# Altium PCB MA730GQ.PcbDoc
Units mil, origin at the board's own origin, x right, y up, seen from the top; angles counter-clockwise.
Board outline 1600 x 1600 mil, 2 copper layers (Top Layer, Bottom Layer); 8 components, 9 nets, 33 pads, 12 vias.
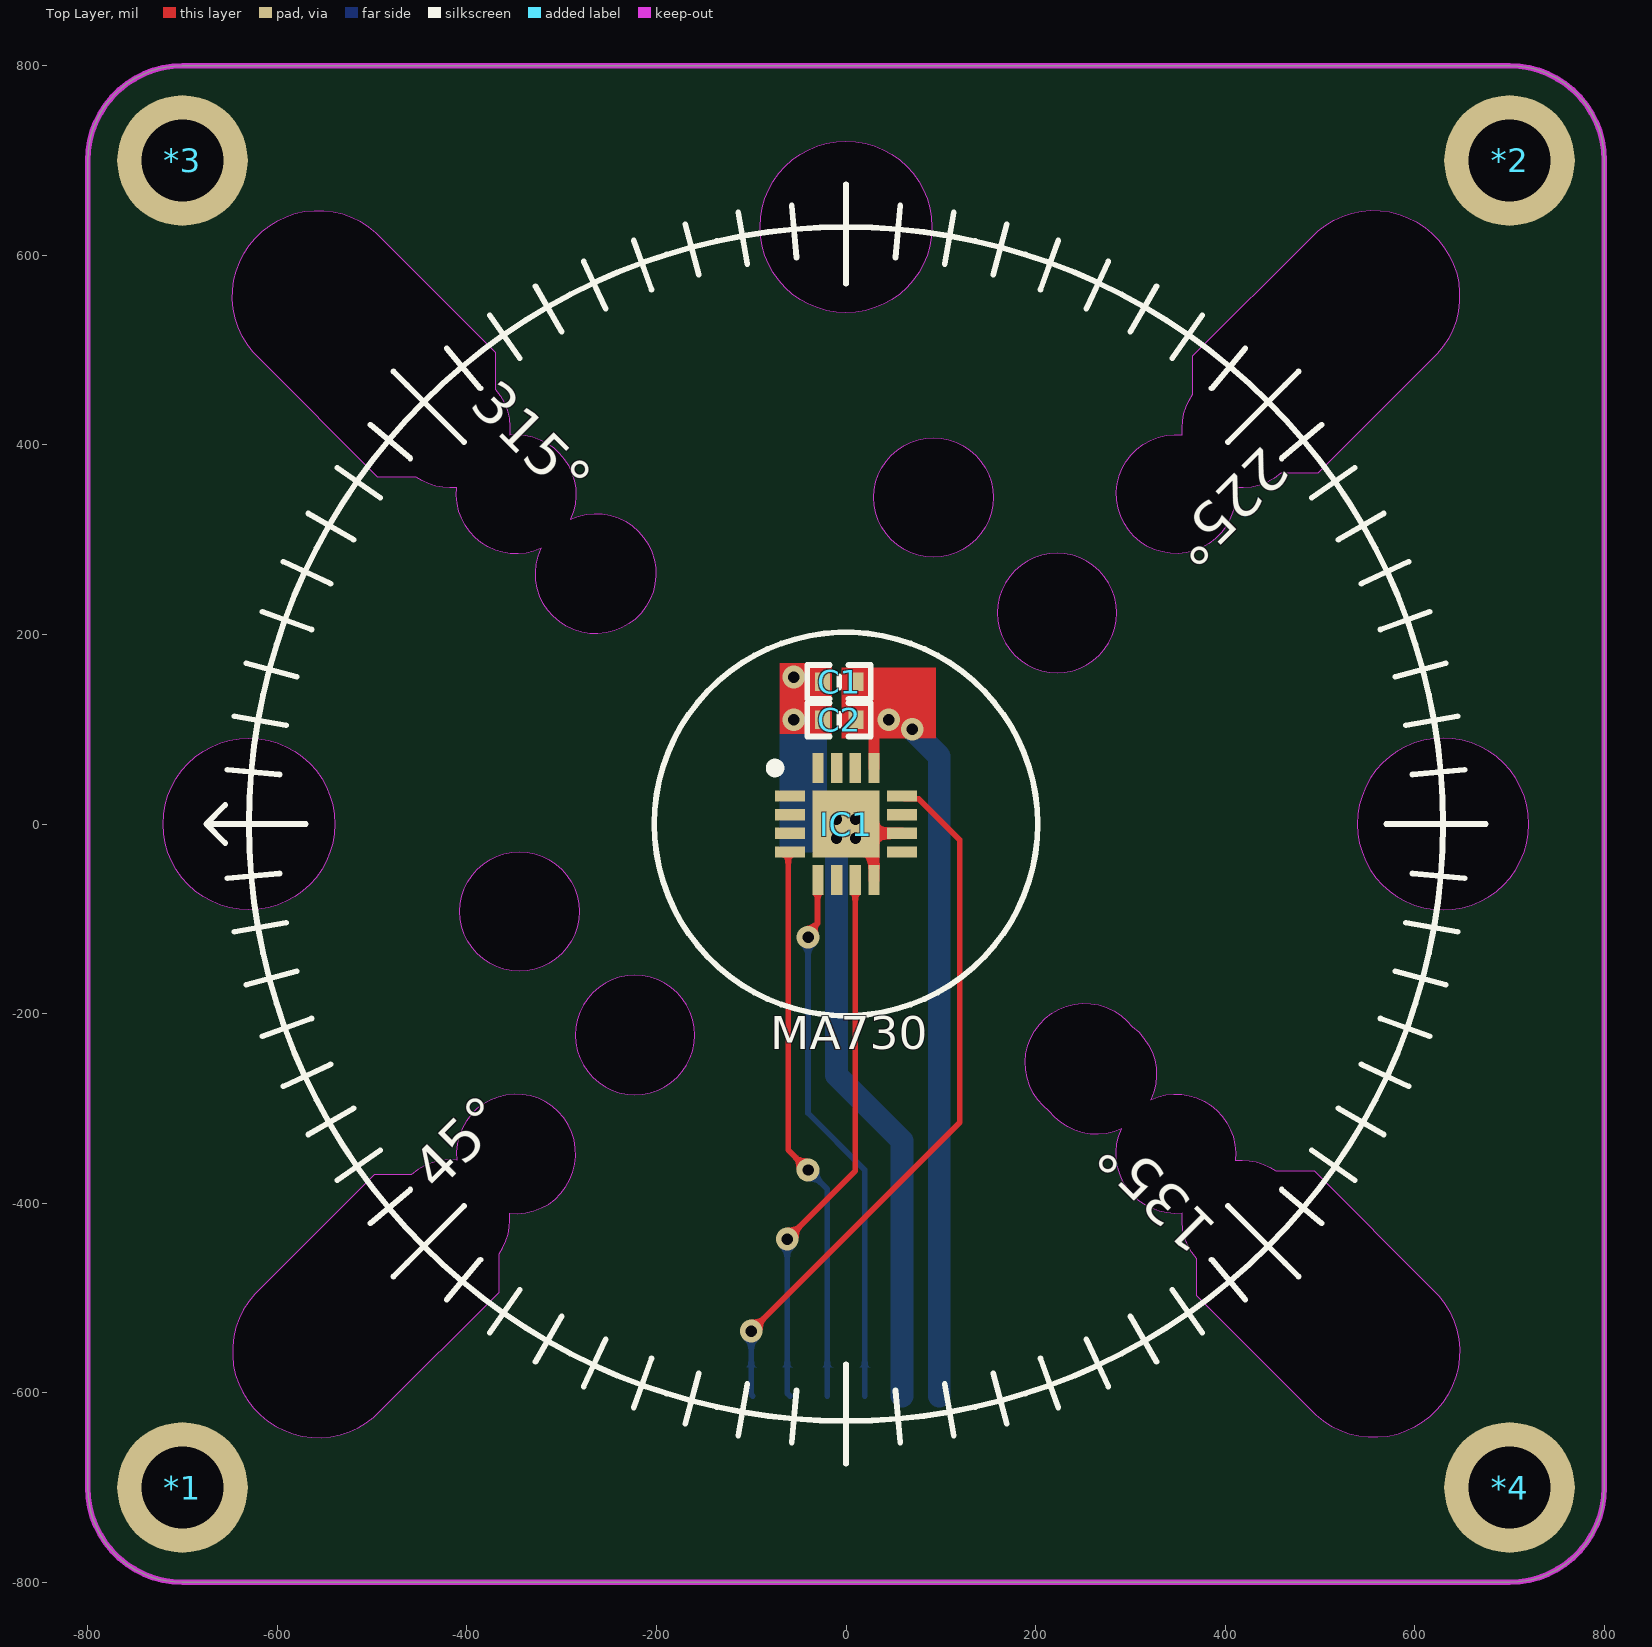
[diagram p0: Top Layer view]
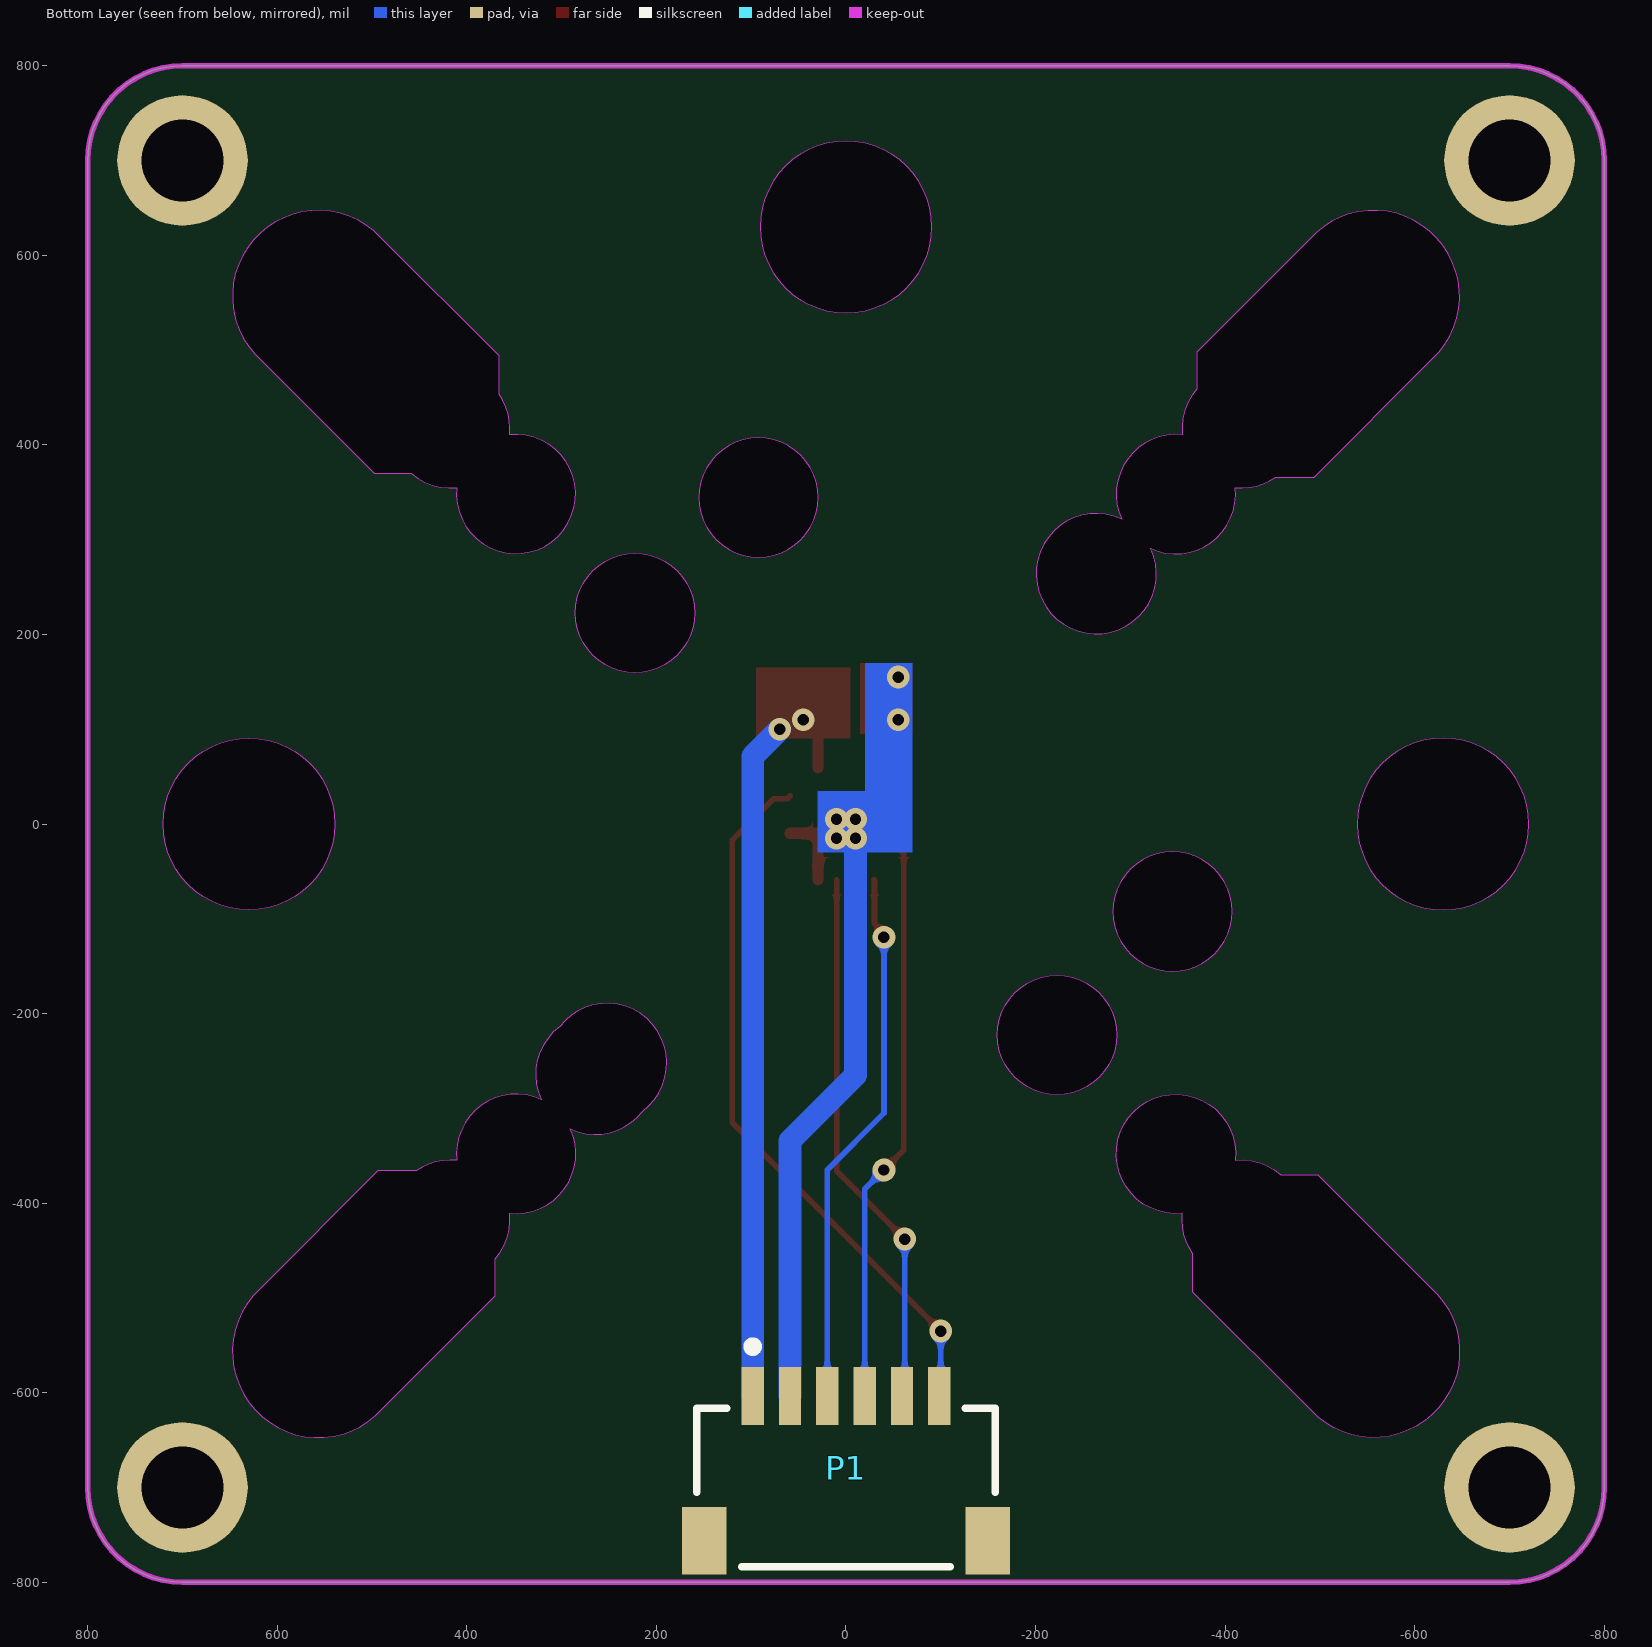
[diagram p1: Bottom Layer view, seen from below]
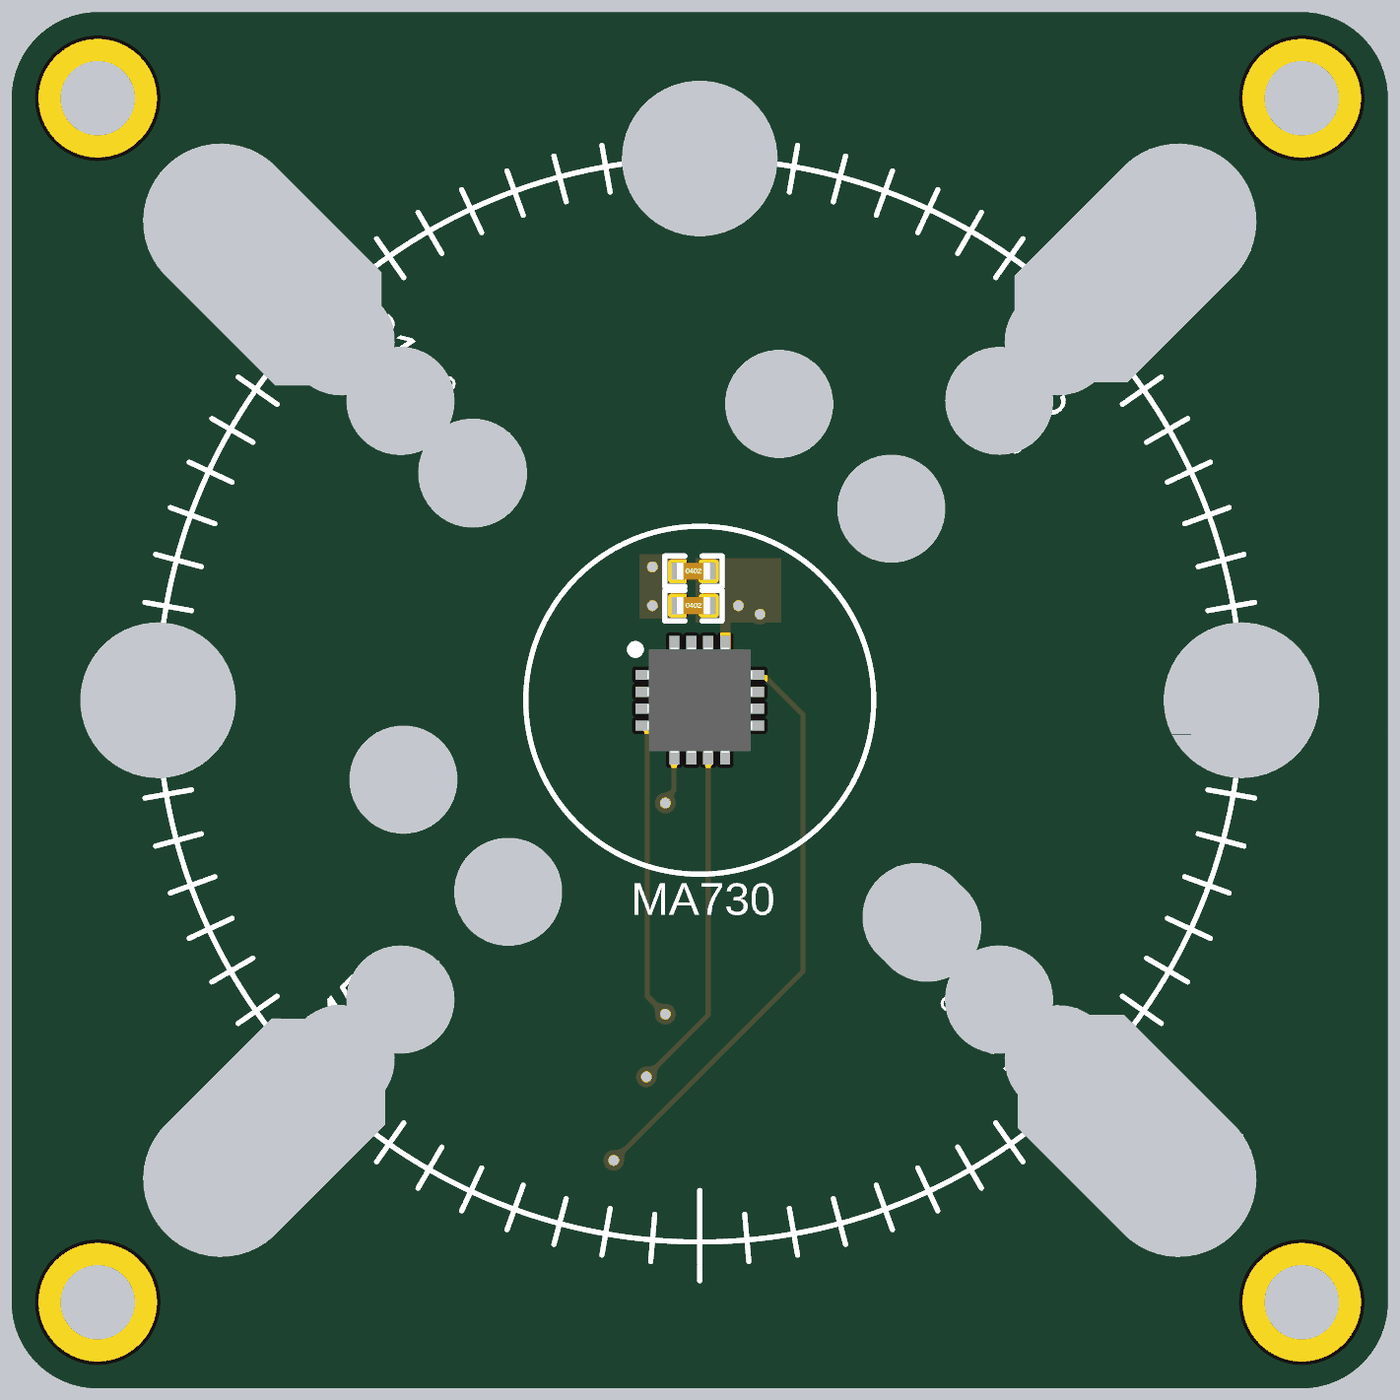
[diagram p2: 3D render of the assembled board from above, using the file's embedded part models]

## Layer stack, top to bottom
Top Solder: solder mask 0.4, Solder Resist, Dk 3.5
Top Layer: signal copper 1.4
Dielectric 1: dielectric 12.6, FR-4, Dk 4.8
Bottom Layer: signal copper 1.4
Bottom Solder: solder mask 0.4, Solder Resist, Dk 3.5

## Board outline
-800,-700 -800,700 cw(c-699.99,699.99) -700,800 700,800 cw(c699.99,699.99) 800,700 800,-700 cw(c699.99,-699.99) 700,-800 -700,-800 cw(c-699.99,-699.99)
cut-out: 267.26,267.26 ccw(c222.72,222.72) 178.18,267.26 ccw(c222.72,222.72) 178.18,178.18 ccw(c222.72,222.72) 267.26,178.18 ccw(c222.72,222.72)
cut-out: -178.16,-178.16 ccw(c-222.7,-222.7) -267.25,-178.16 ccw(c-222.7,-222.7) -267.25,-267.25 ccw(c-222.7,-222.7) -178.16,-267.25 ccw(c-222.7,-222.7)
cut-out: -629.92,-90.55 cw(c-629.92,0) -720.47,0 cw(c-629.92,0) -629.92,90.55 cw(c-629.92,0) -539.37,0 cw(c-629.92,0)
cut-out: 539.37,0 ccw(c629.92,0) 629.92,-90.55 ccw(c629.92,0) 720.47,0 ccw(c629.92,0) 629.92,90.55 ccw(c629.92,0)
cut-out: 0,539.37 cw(c0,629.92) -90.55,629.92 cw(c0,629.92) 0,720.47 cw(c0,629.92) 90.55,629.92 cw(c0,629.92)
cut-out: -344.53,-155.3 cw(c-344.53,-92.31) -407.52,-92.31 cw(c-344.53,-92.31) -344.53,-29.32 cw(c-344.53,-92.31) -281.54,-92.31 cw(c-344.53,-92.31)
cut-out: 92.33,281.55 cw(c92.33,344.55) 29.33,344.55 cw(c92.33,344.55) 92.33,407.54 cw(c92.33,344.55) 155.32,344.55 cw(c92.33,344.55)
cut-out: -493.82,365.83 -618.7,490.71 cw(c-556.77,556.77) -495.99,623.89 -370,497.9 -370,458.91 cw(c-417.56,417.63) -354.97,410.64 cw(c-348.13,347.91) -290.71,321.74 cw(c-264.09,264.1) -321.73,290.72 cw(c-347.98,347.98) -410.59,354.87 cw(c-417.45,417.53) -453.52,365.83
cut-out: -623.89,-495.99 ccw(c-556.77,-556.77) -490.71,-618.7 -365.83,-493.82 -365.83,-453.52 ccw(c-417.57,-417.58) -354.96,-410.6 ccw(c-348.02,-348.04) -410.61,-354.69 ccw(c-417.23,-417.48) -458.91,-370.06 -497.9,-370
cut-out: 354.97,-410.64 cw(c348.13,-347.91) 290.71,-321.74 cw(c264.39,-264.76) 214.67,-303.06 cw(c252.13,-252.27) 302.15,-213.8 cw(c264.3,-264.38) 321.73,-290.72 cw(c347.98,-347.98) 410.59,-354.87 cw(c417.45,-417.53) 453.52,-365.83 493.82,-365.83 618.7,-490.71 cw(c556.77,-556.77) 495.99,-623.89 370,-497.9 370,-458.91 cw(c417.55,-417.63)
cut-out: 354.87,410.59 cw(c417.53,417.45) 365.83,453.52 365.83,493.82 490.71,618.7 cw(c556.77,556.77) 623.89,495.99 497.9,370 458.91,370 cw(c417.63,417.56) 410.64,354.97 cw(c348.17,348.1)

## Design rules (kind name [scope] priority, off if disabled: settings)
Clearance [All] p1: gap=6 ignorepadtopadclearanceinfootprint=TRUE except(0: Arc-Hole Track-Hole SMDPad-Hole THPad-Hole Via-Hole Fill-Hole Poly-Hole Region-Hole Text-Hole)
PolygonConnect [All] p1: connectstyle=Relief reliefconductorwidth=10 reliefentries=4 polygonreliefangle="90 Angle" airgapwidth=10
RoutingVias [All] p1: holewidth=28 width=50 viastyle="Through Hole" minholewidth=12 minwidth=24 maxholewidth=28 maxwidth=50
SolderMaskExpansion [All] p1: expansion=4 istentingtop=FALSE
Width [All] p1: maxlimit=100 minlimit=6 preferedwidth=10
30 further rules are at their usual default settings.

## Components (designator, comment, footprint, x,y, rotation, side; value= is the part's Value field where it differs from the comment)
*1 "PAD2.0" PAD2.0 -699.99,-699.99 r0 top
*2 "PAD2.0" PAD2.0 699.99,699.99 r0 top
*3 "PAD2.0" PAD2.0 -699.99,699.99 r0 top
*4 "PAD2.0" PAD2.0 699.99,-699.99 r0 top
C1 "10uF" "C 0402_L" -7.28,150 r0 top
C2 "0.1uF" "C 0402_L" -7.28,110 r0 top
IC1 "MA730GQ-Z" QFN50P300X300X100-17N-D 0,0 r0 top
P1 "ENC_SPI" JST-SM06B-SRSS-TB_V 0,-700 r180 bottom

## Footprints (in the part's own frame and the unit in brackets; to place one, negate y for a bottom-side part, rotate by r counter-clockwise, add the part's x,y. Pads: shape width x height; smd on the part's side, far side on the other; paste and mask are expansions set on the pad)
"C 0402_L" [mm] "无极性贴片电容         淘宝ID:黄晶宝石"
  rect 0.4x0.5 smd: 1(-0.45,0) 2(0.45,0)
  silkscreen extent -0.85,-0.45 0.85,0.45, body extent -0.5,-0.26 0.5,0.26, height 0.53
JST-SM06B-SRSS-TB_V [mm] "SMD, 6-Leads, Body 8x4.25mm, Pitch 1mm"
  rect 0.6x1.55 smd: 1(-2.5,2.45) 2(-1.5,2.45) 3(-0.5,2.45) 4(0.5,2.45) 5(1.5,2.45) 6(2.5,2.45)
  rect 1.2x1.8 smd: MP1(-3.8,-1.425) MP2(3.8,-1.425)
  silkscreen extent -4,-2.12 4,3.9, body extent -4,-2.12 4,2.83, height 2.9
PAD2.0 [mm]
  round 3.5 hole 2.2: 0(0,0)
QFN50P300X300X100-17N-D [mm]
  rect 0.8x0.3 smd: 1(-1.5,0.75) 2(-1.5,0.25) 3(-1.5,-0.25) 4(-1.5,-0.75) 9(1.5,-0.75) 10(1.5,-0.25) 11(1.5,0.25) 12(1.5,0.75)
  rect 0.3x0.8 smd: 5(-0.75,-1.5) 6(-0.25,-1.5) 7(0.25,-1.5) 8(0.75,-1.5) 13(0.75,1.5) 14(0.25,1.5) 15(-0.25,1.5) 16(-0.75,1.5)
  rect 1.8x1.8 smd: 17(0,0)
  silkscreen extent -2.02,1.38 -1.77,1.62, body extent -1.55,-1.55 1.55,1.55, height 1

## Part data
C1 C2: library part C, "贴片电容"
IC1: "Integrated Circuit", Manufacturer_Name="Monolithic Power Systems (MPS)", Mouser Part Number=946-MA730GQ-Z, Datasheet Link=https://www.monolithicpower.com/pub/media/document/m/a/ma730_r1.01.pdf, Height=1mm, Manufacturer_Part_Number=MA730GQ-Z, Mouser Price/Stock=https://www.mouser.co.uk/ProductDetail/Monolithic-Power-Systems-MPS/MA730GQ-Z?qs=YCa%2FAAYMW01z3klrRj76PA%3D%3D
P1: library part SM06B-SRSS-TB(LF)(SN), "Male Header, Pitch 1 mm, 1 x 6 Position, Height 2.9 mm, -25 to 85 degC, RoHS, Tape and Reel", Manufacturer=JST, Package Description="Male Header, Pitch 1 mm, 1 X 6 Position, Height 2.9 mm", Datasheet URL=http://www.jst-mfg.com/product/pdf/eng/eSR.pdf, Datasheet Version=05/2016, Manufacturer URL=http://www.jst.com/home2.html, Mounting Technology=SurfaceMount, No of Positions=6, Package Reference=SM06B-SRSS-TB(LF)(SN), Pitch=1mm, Style/Orientation=RightAngleHeader/Plug, Termination=Solder, Type=ShroudedHeader

## Via types
v1: diameter 24, hole 12, Top Layer to Bottom Layer, tented both sides, 12 vias

## Nets (pads, with @x,y where several pads share a name; then routed paths per layer and width w, separated by ;. In a path a pad name is that pad's centre, name@x,y a point inside that pad or via, vN(x,y) a via of type N, cw(c..) or ccw(c..) an arc to the next point about the centre after c; other vN are vias at no path point)
ENC_A: IC1.2
ENC_B: IC1.6
ENC_I: IC1.3
GND: C1.1 C2.1 IC1.8 IC1.10 IC1.17 P1.2 | length 988.9
  Top Layer w12: v1(-55,110) C2.1 ; v1(-55,155) -52.7,152.7 -26.87,152.7 -25,150.83 C1.1 ; v1(10,-15) 15.16,-9.84 IC1.17@30,-9.84 ; IC1.8 29.53,-10.32 IC1.17@30,-9.84 ; IC1.10 IC1.17@30,-9.84
  Bottom Layer w10: -20,25 20,25
  Bottom Layer w12: v1(-55,155) v1(-55,110) -29,84 -29,24 v1(-10,5)
  Bottom Layer w24: v1(-10,-15) -10,-265 59.06,-334.06 P1.2
  other v1: 10,5
SPI_CLK: IC1.12 P1.6 | length 758.7
  Top Layer w6: v1(-100,-535) 120,-315 120,-16.72 76.66,26.62 61.96,26.62 IC1.12
  Bottom Layer w6: v1(-100,-535) -100,-601.97 P1.6
SPI_CS: IC1.5 P1.3 | length 573.5
  Top Layer w6: v1(-40,-119.5) -40,-114.63 -30,-104.63 -30,-59.53 IC1.5
  Bottom Layer w6: v1(-40,-119.5) -40,-305 19.69,-364.68 P1.3
SPI_MISO: IC1.7 P1.5 | length 575.5
  Top Layer w6: v1(-62.06,-437.94) 9.84,-366.05 IC1.7
  Bottom Layer w6: v1(-62.06,-437.94) -62.06,-600.54 P1.5
SPI_MOSI: IC1.4 P1.4 | length 591.9
  Top Layer w6: IC1.4 -61,-31.47 -61,-344 v1(-40,-365)
  Bottom Layer w6: v1(-40,-365) -19.68,-385.31 P1.4
VCC3V: C1.2 C2.2 IC1.13 P1.1 | length 876.4
  Top Layer w12: IC1.13 29.53,92.8 45,108.28 v1(45,110) 47.3,107.7 59.05,107.7 66.75,100 v1(70,100)
  Top Layer w24: C1.2 C2.2 v1(45,110)
  Bottom Layer w24: v1(70,100) 98.43,71.57 P1.1
pads on no net: *1.0 *2.0 *3.0 *4.0 IC1.1 IC1.9 IC1.11 IC1.14 IC1.15 IC1.16 P1.MP1 P1.MP2

## Keep-outs
Keep-Out Layer:
  the board outline again, w6

## Other copper
Top Layer:
  rectangle net GND: -70,95 -15,170
  rectangle net VCC3V: -5,90 95,165
Bottom Layer:
  rectangle net GND: -70,-30 -20,170
  rectangle net GND: -35,-30 30,35

## Silkscreen, mask and mechanical layers (free items; w line width, h text height)
Top Overlay:
  circle w6: c0,0 r629.92
  circle w6: c0,0 r202.3
  lines w6: -655,-20 -675,0 ; -655,20 -675,0 ; -652.56,-57.09 -597.72,-52.29 ; -652.56,57.09 -597.72,52.29 ; -645.1,-113.75 -590.88,-104.19 ; -645.1,113.75 -590.89,104.19 ; -632.73,-169.54 -579.56,-155.29 ; -632.73,169.54 -579.56,155.29 ; -615.55,-224.04 -563.82,-205.21 ; -615.55,224.04 -563.82,205.21 ; -593.68,-276.84 -543.78,-253.57 ; -593.68,276.84 -543.79,253.57 ; -570,0 -675,0 ; -567.29,-327.53 -519.62,-300 ; -567.29,327.53 -519.62,300 ; -536.59,-375.72 -491.49,-344.15 ; -536.59,375.72 -491.49,344.15 ; -501.8,-421.06 -459.63,-385.67 ; -501.8,421.06 -459.63,385.67 ; -477.3,-477.3 -403.05,-403.05 ; -477.3,477.3 -403.05,403.05 ; -463.19,-463.19 -424.26,-424.26 ; -463.19,463.19 -424.26,424.26 ; -421.06,-501.8 -385.67,-459.63 ; -421.06,501.8 -385.67,459.63 ; -375.72,-536.59 -344.15,-491.49 ; -375.72,536.59 -344.15,491.49 ; -327.53,-567.29 -300,-519.62 ; -327.53,567.29 -300,519.62 ; -276.84,-593.68 -253.57,-543.78 ; -276.84,593.68 -253.57,543.79 ; -224.04,-615.55 -205.21,-563.82 ; -224.04,615.55 -205.21,563.82 ; -169.54,-632.73 -155.29,-579.56 ; -169.54,632.73 -155.29,579.56 ; -113.75,-645.1 -104.19,-590.88 ; -113.75,645.1 -104.19,590.89 ; -57.09,-652.56 -52.29,-597.72 ; -57.09,652.56 -52.29,597.72 ; 0,-675 0,-570 ; 0,-655.05 0,-600 ; 0,570 0,675 ; 0,600 0,655.05 ; 52.29,-597.72 57.09,-652.56 ; 52.29,597.72 57.09,652.56 ; 104.19,-590.88 113.75,-645.1 ; 104.19,590.89 113.75,645.1 ; 155.29,-579.56 169.54,-632.73 ; 155.29,579.56 169.54,632.73 ; 205.21,-563.82 224.04,-615.55 ; 205.21,563.82 224.04,615.55 ; 253.57,-543.78 276.84,-593.68 ; 253.57,543.79 276.84,593.68 ; 300,-519.62 327.53,-567.29 ; 300,519.62 327.53,567.29 ; 344.15,-491.49 375.72,-536.59 ; 344.15,491.49 375.72,536.59 ; 385.67,-459.63 421.06,-501.8 ; 385.67,459.63 421.06,501.8 ; 403.05,-403.05 477.3,-477.3 ; 403.05,403.05 477.3,477.3 ; 424.26,-424.26 463.19,-463.19 ; 424.26,424.26 463.19,463.19 ; 459.63,-385.67 501.8,-421.06 ; 459.63,385.67 501.8,421.06 ; 491.49,-344.15 536.59,-375.72 ; 491.49,344.15 536.59,375.72 ; 519.62,-300 567.29,-327.53 ; 519.62,300 567.29,327.53 ; 543.78,-253.57 593.68,-276.84 ; 543.78,253.57 593.68,276.84 ; 563.82,-205.21 615.55,-224.04 ; 563.82,205.21 615.55,224.04 ; 570,0 675,0 ; 579.56,-155.29 632.73,-169.54 ; 579.56,155.29 632.73,169.54 ; 590.89,-104.19 645.1,-113.75 ; 590.88,104.19 645.1,113.75 ; 597.72,-52.29 652.56,-57.09 ; 597.72,52.29 652.56,57.09 ; 600,0 655.05,0
  text "315°" at -408.31,430.66 h75 r315
  text "225°" at 429.6,411.15 h75 r225
  text "MA730" at -80,-249.36 h60
  text "45°" at -420.56,-399.44 h75 r45
  text "135°" at 404.4,-415.53 h75 r135
Mechanical 1:
  circle w6: c222.72,222.72 r62.99
  circle w6: c-222.7,-222.7 r62.99
  circle w6: c92.33,344.55 r62.99
  circle w6: c-344.53,-92.31 r62.99
  circle w6: c0,629.92 r90.55
  circle w6: c-629.92,0 r90.55
  circle w6: c629.92,0 r90.55
  lines w5.98: -800,-700 ccw(c-699.99,-699.99) -700,-800 700,-800 ccw(c699.99,-699.99) 800,-700 800,700 ccw(c699.99,699.99) 700,800 -700,800 ccw(c-699.99,699.99) -800,700 -800,-700
  lines w6: -458.91,-370.06 cw(c-417.57,-417.58) -410.64,-354.97 ; -458.91,-370 -497.9,-370 -623.89,-495.99 ccw(c-556.77,-556.77) -490.71,-618.7 -365.83,-493.82 -365.83,-468.17 -365.83,-453.52 ccw(c-417.57,-417.58) -354.96,-410.6 ; -410.61,-354.69 cw(c-347.98,-347.98) -354.87,-410.59 ; -410.59,354.87 ccw(c-347.98,347.98) -321.73,290.72 ccw(c-264.46,264.48) -291.05,321.58 ; -410.6,354.96 cw(c-417.58,417.57) -453.52,365.83 -468.17,365.83 -493.82,365.83 -618.7,490.71 cw(c-556.77,556.77) -495.99,623.89 -370,497.9 -370,458.91 ; -370.06,458.91 cw(c-417.58,417.57) -354.97,410.64 ; -354.69,410.61 cw(c-347.98,347.98) -290.71,321.74 ; 214.67,-303.06 ccw(c264.46,-264.48) 291.04,-321.58 ; 214.85,-302.92 cw(c252.23,-252.21) 302.15,-213.8 ; 290.71,-321.74 ccw(c347.98,-347.98) 354.69,-410.61 ; 302.19,-214.03 cw(c264.46,-264.48) 321.73,-290.72 cw(c347.98,-347.98) 410.59,-354.87 ; 354.87,410.59 ccw(c347.98,347.98) 410.61,354.69 ; 354.97,-410.64 ccw(c417.58,-417.57) 370.06,-458.91 ; 354.96,410.6 cw(c417.57,417.58) 365.83,453.52 365.83,468.17 365.83,493.82 490.71,618.7 cw(c556.77,556.77) 623.89,495.99 497.9,370 458.91,370 ; 370,-458.91 370,-497.9 495.99,-623.89 ; 410.6,-354.96 cw(c417.58,-417.57) 453.52,-365.83 468.17,-365.83 493.82,-365.83 618.7,-490.71 cw(c556.77,-556.77) 495.99,-623.89 ; 410.64,354.97 ccw(c417.57,417.58) 458.91,370.06